# EAGLE board pressure_regulator_rev2 (EAGLE 8.3.1)
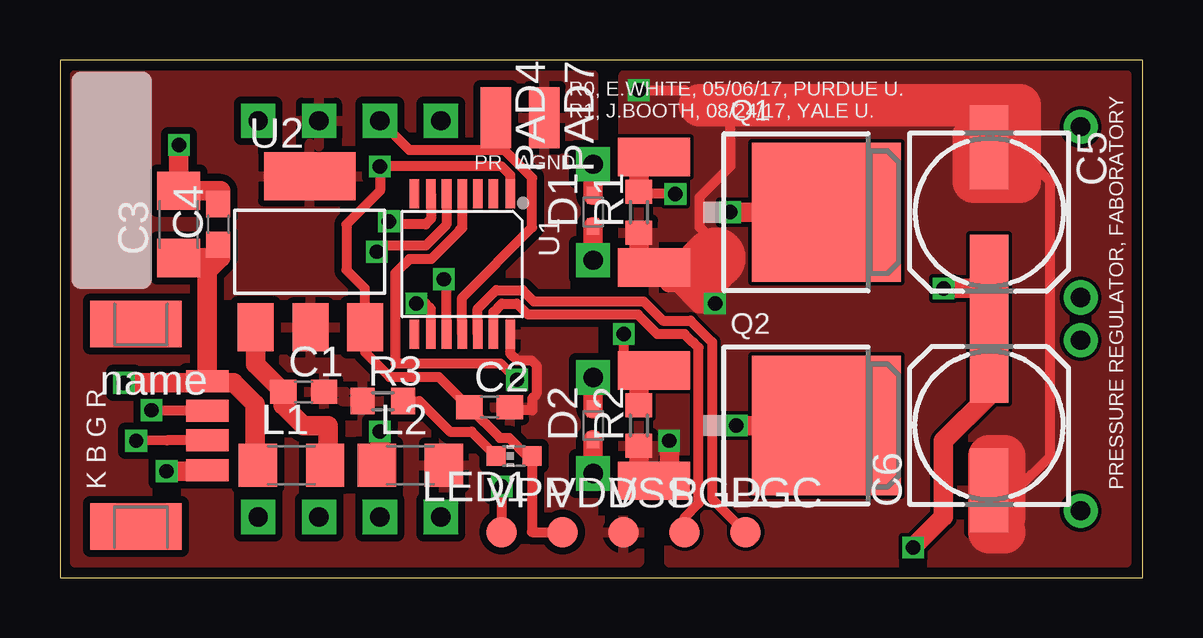
[diagram p0: board, top side]
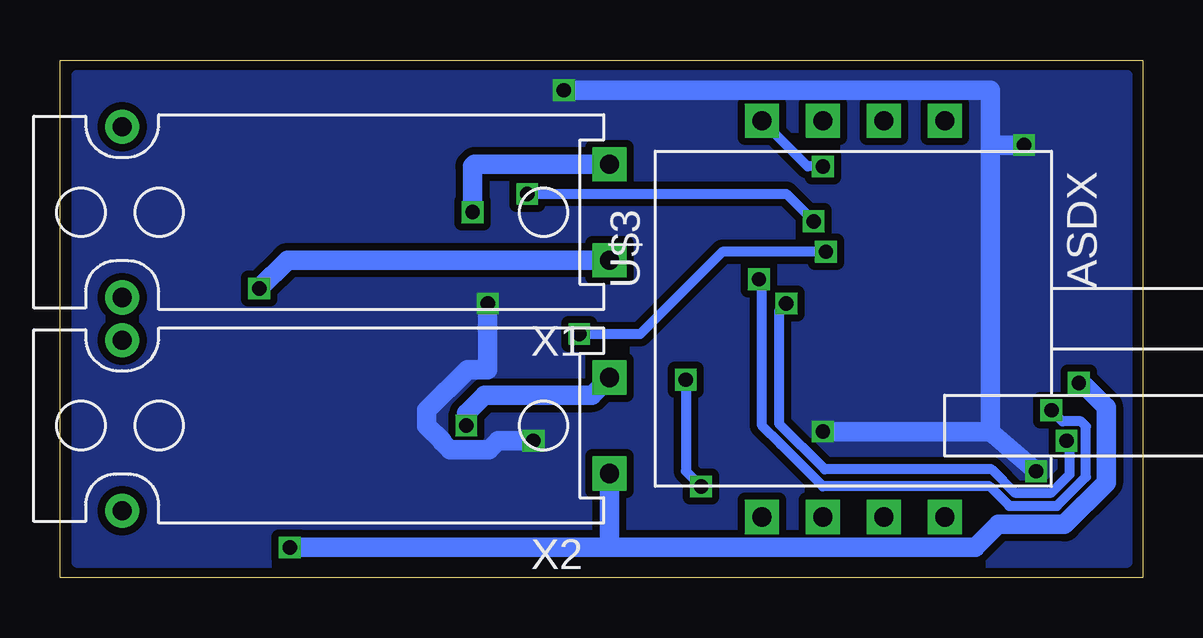
[diagram p1: board, bottom side, seen from below]

Size 45.14 x 21.58 mm. Coordinates in mm from the lower left corner, seen from the top.
Outline: 0,0 45.14,0 45.14,21.58 0,21.58 0,0
Copper layers (1*16): Top 0.035mm / dielectric 1.5mm / Bottom 0.035mm
Design rules "SeeedStudio_2layer_DRU_no_angle_20140221 *": minimum track width 6mil, minimum drill 12mil, track to track 6mil, track to pad 6mil, pad to pad 6mil, via to via 6mil, smd to smd 0mil, copper to edge 10mil, drill to drill 10mil, minimum pad ring 10mil, minimum via ring 6mil, stop-mask expansion 4mil, vias tented up to drill 100mil, thermal gap 10mil

## Footprints (pad centres in the part's own frame; a part is rotated, then mirrored left to right if it is on the bottom)
C0603 = smd 1.1 x 1: 1 -0.85,0; 2 0.85,0
C1206 = smd 1.6 x 1.8: 1 -1.4,0; 2 1.4,0
153CLV-0605 = smd 3.5 x 1.6: + 2.7,0; - -2.7,0
SOD523 = smd 0.7 x 0.5: A 0.7,0; C -0.6,0
L1206 = smd 1.6 x 1.8: 1 -1.4,0; 2 1.4,0
CHIP-LED0603 = smd 0.8 x 0.8: A 0,-0.75; C 0,0.75
SMD1,27-2,54 = smd 1.27 x 2.54: 1 0,0
B1,27 = smd 1.27 x 1.27: TP 0,0
DPAK = smd 3 x 1.6: 1 0,-2.3; 2 0,2.3 | smd 6.2 x 5.8: 3 -7.18,0
R0603 = smd 1 x 1.1: 1 -0.85,0; 2 0.85,0
TSSOP14-0.65-5X4.4MM = smd 0.4 x 1.2: 1 -2,-2.925; 2 -1.3,-2.925; 3 -0.65,-2.925; 4 0,-2.925; 5 0.65,-2.925; 6 1.3,-2.925; 7 2,-2.925; 8 2,2.925; 9 1.3,2.925; 10 0.65,2.925; 11 0,2.925; 12 -0.65,2.925; 13 -1.3,2.925; 14 -2,2.925
SOT223 = smd 1.499 x 2.007: 1 -2.261,-3.15; 2 0.025,-3.15; 3 2.311,-3.15 | smd 3.81 x 2.007: 4 0,3.15
PICOBLADE4POSMALEHEADER = smd 3.81 x 1.93: ANCHOR -1.03,4.23; ANCHOR2 -1.03,-4.21 | smd 1.778 x 0.914: GND 1.95,-1.87; SCK 1.95,0.61; SDI 1.95,-0.62; VCC 1.95,1.84
ASDX = drill 0.8 pad 1.422 square: P1 8.255,3.81; P2 8.255,1.27; P3 8.255,-1.27; P4 8.255,-3.81; P5 -8.255,3.81; P6 -8.255,1.27; P7 -8.255,-1.27; P8 -8.255,-3.81
X-VALVE = drill 0.8 pad 1.422 square: P$1 0,2; P$2 0,-2 | drill 0.8 pad 1.422: P$3 20.32,3.556; P$4 20.32,-3.556

## Placement (x,y rotation side)
C1  1uF  [C0603]  10.16,7.75 0 top
C2  1uF  [C0603]  17.91,7.11 0 top
C3  10uF  [C1206]  4.95,14.73 90 top
C4  1uF  [C0603]  6.6,14.73 90 top
C5  100uF  [153CLV-0605]  38.73,15.24 270 top
C6  100uF  [153CLV-0605]  38.73,6.35 90 top
D1  [SOD523]  22.23,15.24 90 top
D2  [SOD523]  22.23,6.35 90 top
L1  [L1206]  9.65,4.7 0 top
L2  [L1206]  14.61,4.7 0 top
LED1  [CHIP-LED0603]  18.92,5.08 90 top
PAD4  [SMD1,27-2,54]  18.16,19.18 180 top
PAD7  [SMD1,27-2,54]  20.19,19.18 180 top
PGC  TPB1,27  [B1,27]  28.57,1.91 0 top
PGD  TPB1,27  [B1,27]  26.04,1.91 0 top
Q1  NTD5805NT4G  [DPAK]  24.77,15.24 180 top
Q2  NTD5805NT4G  [DPAK]  24.77,6.35 180 top
R1  10K  [R0603]  24.13,15.24 90 top
R2  10K  [R0603]  24.13,6.35 90 top
R3  150  [R0603]  13.46,7.37 0 top
U1  PIC16F1825-I/ST-TSSOP14  [TSSOP14-0.65-5X4.4MM]  16.76,13.08 180 top
U2  MIC5200  [SOT223]  10.41,13.59 0 top
U$1  PICOBLADE4POS1.25MMRIGHTANGLESURFACE  [PICOBLADE4POSMALEHEADER]  4.19,6.35 0 top
U$3  ASDX  [ASDX]  12.07,10.79 90 bottom
VDD  TPB1,27  [B1,27]  20.96,1.91 0 top
VPP  TPB1,27  [B1,27]  18.41,1.91 0 top
VSS  TPB1,27  [B1,27]  23.5,1.91 0 top
X1  X-VALVE  [X-VALVE]  22.23,15.24 180 bottom
X2  X-VALVE  [X-VALVE]  22.23,6.35 180 bottom

## Library data of the parts
C1-C6 L1 L2 R1-R3 = rcl
D1 D2 = diode
LED1 = led
PAD4 PAD7 = wirepad
PGC PGD VDD VPP VSS = testpad
Q1 Q2 = Seeed-OPL-Transistor; MPN: NTD5805NT4G
U1 = Seeed-OPL-ic; MPN: PIC16F1825-I/ST
U2 = microchip
U$1 = MolexConnector
U$3 = honeywell_pressure_sensors
X1 X2 = parker-valve

## Nets
+5V: C2.1 LED1.A U1.1 U2.3 U$3.P1 VDD.TP
AGND: C1.2 C2.2 L2.2 PAD7.1 R3.1 U1.14 U2.2 U2.4 U$3.P3 VSS.TP
GND: C3.2 C4.2 C5.- C6.- L2.1 Q1.2 Q2.2 R1.1 R2.1 U$1.GND
N$1: D1.A Q1.3 X1.P$2
N$2: D2.A Q2.3 X2.P$2
N$3: C1.1 L1.2 U2.1
N$6: LED1.C R3.2
PGC: PGC.TP U1.12
PGD: PGD.TP U1.13
PRESSURE: PAD4.1 U1.11 U$3.P2
SCK: U1.10 U$1.SCK
SDI: U1.9 U$1.SDI
SOL1: Q1.1 R1.2 U1.6
SOL2: Q2.1 R2.2 U1.5
VCC: C3.1 C4.1 C5.+ C6.+ D1.C D2.C L1.1 U$1.VCC X1.P$1 X2.P$1
VPP: U1.4 VPP.TP

## Tracks (layer width: path | path; a pad name or v marks a point on that pad's centre or on a via)
+5V  (via drill 0.6)
  Top 0.406: LED1.A 19.69,5.07 | 12.95,10.67 U2.3 | LED1.A 19.67,1.92 19.69,1.91 VDD.TP | U1.1 18.76,16.8 18.41,17.14 v13.34,17.14 13.34,16.13 11.94,14.73 11.94,12.83 12.7,12.06 12.7,10.46 U2.3 | LED1.A 19.48,5.08 18.72,5.84 18.33,5.84 C2.1 15.79,8.38 13.74,8.38 13.6,8.52 | U2.3 12.73,9.39 13.6,8.52 | 13.6,8.52 13.63,8.49
  Bottom 0.406: v13.34,17.14 13.97,17.14 U$3.P1
AGND
  Top 0.406: U1.14 18.76,9.35 19.05,9.06 19.65,9.06 19.86,8.86 19.86,7.66 19.69,7.48 19.69,6.99 18.88,6.99 C2.2
  pour Top (isolate 0.305): 22.23,20.95 22.23,2.41 24.13,2.41 24.13,0.64 0.63,0.64 0.63,20.95
GND  (via drill 0.6)
  Top 0.406: v24.13,20.32 26.04,20.32 26.67,19.68 27.3,19.05 27.94,19.05 27.94,17.14 26.67,15.88 26.67,14.61 27.3,13.97 27.3,13.34 | 25.01,12.7 Q1.2 | C6.- 39.84,3.65 41.27,5.08 41.27,16.51 40.64,17.14 39.53,17.14 C5.-
  Top 0.813: C4.2 6.69,16.13 C3.2 v4.95,18.03 | R1.1 24.13,13.57 Q1.2 25.42,12.29 25.8,12.29 26.66,11.43 v27.3,11.43 | R2.1 24.13,4.68 Q2.2 25.16,4.05 25.4,3.81 v25.4,5.71 | v13.34,6.1 13.34,4.82 L2.1 | v4.45,4.45 6.11,4.45 U$1.GND
  Top 1.778: 26.67,19.68 40.01,19.68 40.01,16.51 38.1,16.51 38.1,18.41 38.26,18.41 C5.- | 39.37,1.91 38.73,1.91 C6.- 38.73,5.08 39.37,5.08 39.37,2.54
  Top 2.54: 26.91,12.94 27.3,13.34
  Bottom 0.813: v24.13,20.32 6.35,20.32 6.35,17.78 | 6.35,6.1 v13.34,6.1 | v4.45,4.45 6.35,6.1 | 6.35,17.78 6.35,6.1 | v27.3,11.43 27.3,8.68 28.15,8.68 29.84,6.99 29.84,6.35 29.21,5.71 29.21,5.67 28.88,5.34 27.26,5.34 26.88,5.71 v25.4,5.71 | v4.95,18.03 6.1,18.03 6.35,17.78
  pour Bottom (isolate 0.305): 44.45,20.95 44.45,0.64 0.63,0.64 0.63,20.95
  pour Top: 23.5,20.95 44.45,20.95 44.45,0.64 25.4,0.64 25.4,3.43 23.5,3.43
N$1  (via drill 0.6)
  Top 0.813: D1.A X1.P$2 | v27.94,15.24 Q1.3
  Bottom 0.813: X1.P$2 27.85,17.24 27.94,17.14 v27.94,15.24
N$2  (via drill 0.6)
  Top 0.813: D2.A X2.P$2 | Q2.3 v28.19,6.35
  Bottom 0.813: v28.19,6.35 28.19,6.86 27.43,7.62 22.96,7.62 X2.P$2
N$3
  Top 0.813: U2.1 8.15,8.9 C1.1 9.31,7.2 10.16,6.35 11.18,6.35 11.18,4.83 L1.2
N$6
  Top 0.406: R3.2 14.99,7.37 16.26,6.1 17.16,6.1 LED1.C
PGC
  Top 0.406: PGC.TP 27.18,3.3 27.18,9.83 26.29,10.72 25.13,10.72 24.33,11.53 19.74,11.53 19.28,11.99 18.18,11.99 17.41,11.22 U1.12
PGD
  Top 0.406: PGD.TP 26.04,2.52 26.62,3.1 26.62,9.6 26.41,9.81 26.39,9.81 26.04,10.16 24.9,10.16 24.1,10.97 19.51,10.97 19.05,11.43 18.41,11.43 18.06,11.08 U1.13
PRESSURE
  Top 0.406: U1.11 16.76,11.68 19.69,14.61 19.69,16.66 18.52,17.83 17.78,17.83 | PAD4.1 17.78,18.8 17.78,17.83 | U$3.P2 14.55,17.83 17.78,17.83
SCK  (via drill 0.6)
  Top 0.406: v3.81,6.99 6.12,6.99 U$1.SCK | U1.10 16.11,12.33 v16,12.45
  Bottom 0.406: v3.81,6.99 3.35,6.52 2.58,6.52 2.37,6.32 2.37,4.21 3.58,3 5.57,3 6.38,3.81 13.34,3.81 13.49,3.96 | 13.49,3.96 | 15.09,5.56 | 15.09,5.56 15.88,6.35 15.88,12.32 v16,12.45 | 13.49,3.96 15.09,5.56
SDI  (via drill 0.6)
  Top 0.406: U$1.SDI 4.46,5.73 v3.17,5.71 | U1.9 15.46,11.21 15.24,11.43 v14.86,11.43
  Bottom 0.406: v3.17,5.71 3.05,5.59 3.05,4.32 3.81,3.56 5.33,3.56 6.3,4.52 13.26,4.52 15.16,6.43 15.16,11.13 v14.86,11.43
SOL1  (via drill 0.6)
  Top 0.406: v25.65,16 24.22,16 R1.2 | U1.6 15.46,14.96 15.24,14.73 13.84,14.73 v13.72,14.86
  Top 0.813: R1.2 24.13,16.91 Q1.1
  Bottom 0.406: v25.65,16 14.86,16 v13.72,14.86
SOL2  (via drill 0.6)
  Top 0.406: v23.5,10.16 23.5,8.89 24.53,8.89 Q2.1 | U1.5 16.11,14.72 15.24,13.84 13.46,13.84 v13.21,13.59
  Top 0.813: R2.2 24.13,8.26 24.37,8.26 Q2.1
  Bottom 0.406: v23.5,10.16 20.96,10.16 17.53,13.59 v13.21,13.59
VCC  (via drill 0.6)
  Top 0.406: C6.+ C5.+
  Top 0.813: L1.1 8.51,4.7 8.13,5.08 8.13,7.24 7.24,8.13 6.2,8.13 U$1.VCC | 6.69,13.33 C3.1 | 6.69,13.33 C4.1 | U$1.VCC 6.14,12.78 6.69,13.33 | 38.73,10.79 C5.+ 38.26,12.06 v36.83,12.06 | C6.+ 38.73,7.62 36.83,5.71 36.83,2.54 v35.56,1.27 | v2.67,8.13 6.08,8.13 U$1.VCC | X2.P$1 D2.C | D1.C X1.P$1
  Bottom 0.813: v2.67,8.13 2.54,8.13 1.52,7.11 1.52,3.97 3.26,2.23 6.02,2.23 6.99,1.27 22.23,1.27 | 22.23,1.27 v35.56,1.27 | 22.23,1.27 X2.P$1 | X1.P$1 35.66,13.24 v36.83,12.06
VPP  (via drill 0.6)
  Top 0.406: v18.41,3.81 VPP.TP | U1.4 16.76,14.61 | 16.76,14.61 16.76,14.58 | 16.76,14.61 16.67,14.51 16.67,14.49 15.47,13.28 14.57,13.28 14.32,13.04 14.3,13.04 13.97,12.7 13.97,8.94 18.36,8.94 v19.05,8.26
  Bottom 0.406: v19.05,8.26 19.05,4.45 v18.41,3.81

## Text on the board
top_silk: R0, E.WHITE, 05/06/17, PURDUE U. / R1, J.BOOTH, 08/24/17, YALE U. | PR | AGND | K B G R | PRESSURE REGULATOR, FABORATORY